# Altium PCB uSwitchCoder.PcbDoc
Units mm, origin at the board's own origin, x right, y up, seen from the top; angles counter-clockwise.
Board outline 45 x 35 mm, 2 copper layers (Top Layer, Bottom Layer); 21 components, 16 nets, 91 pads, 41 vias.
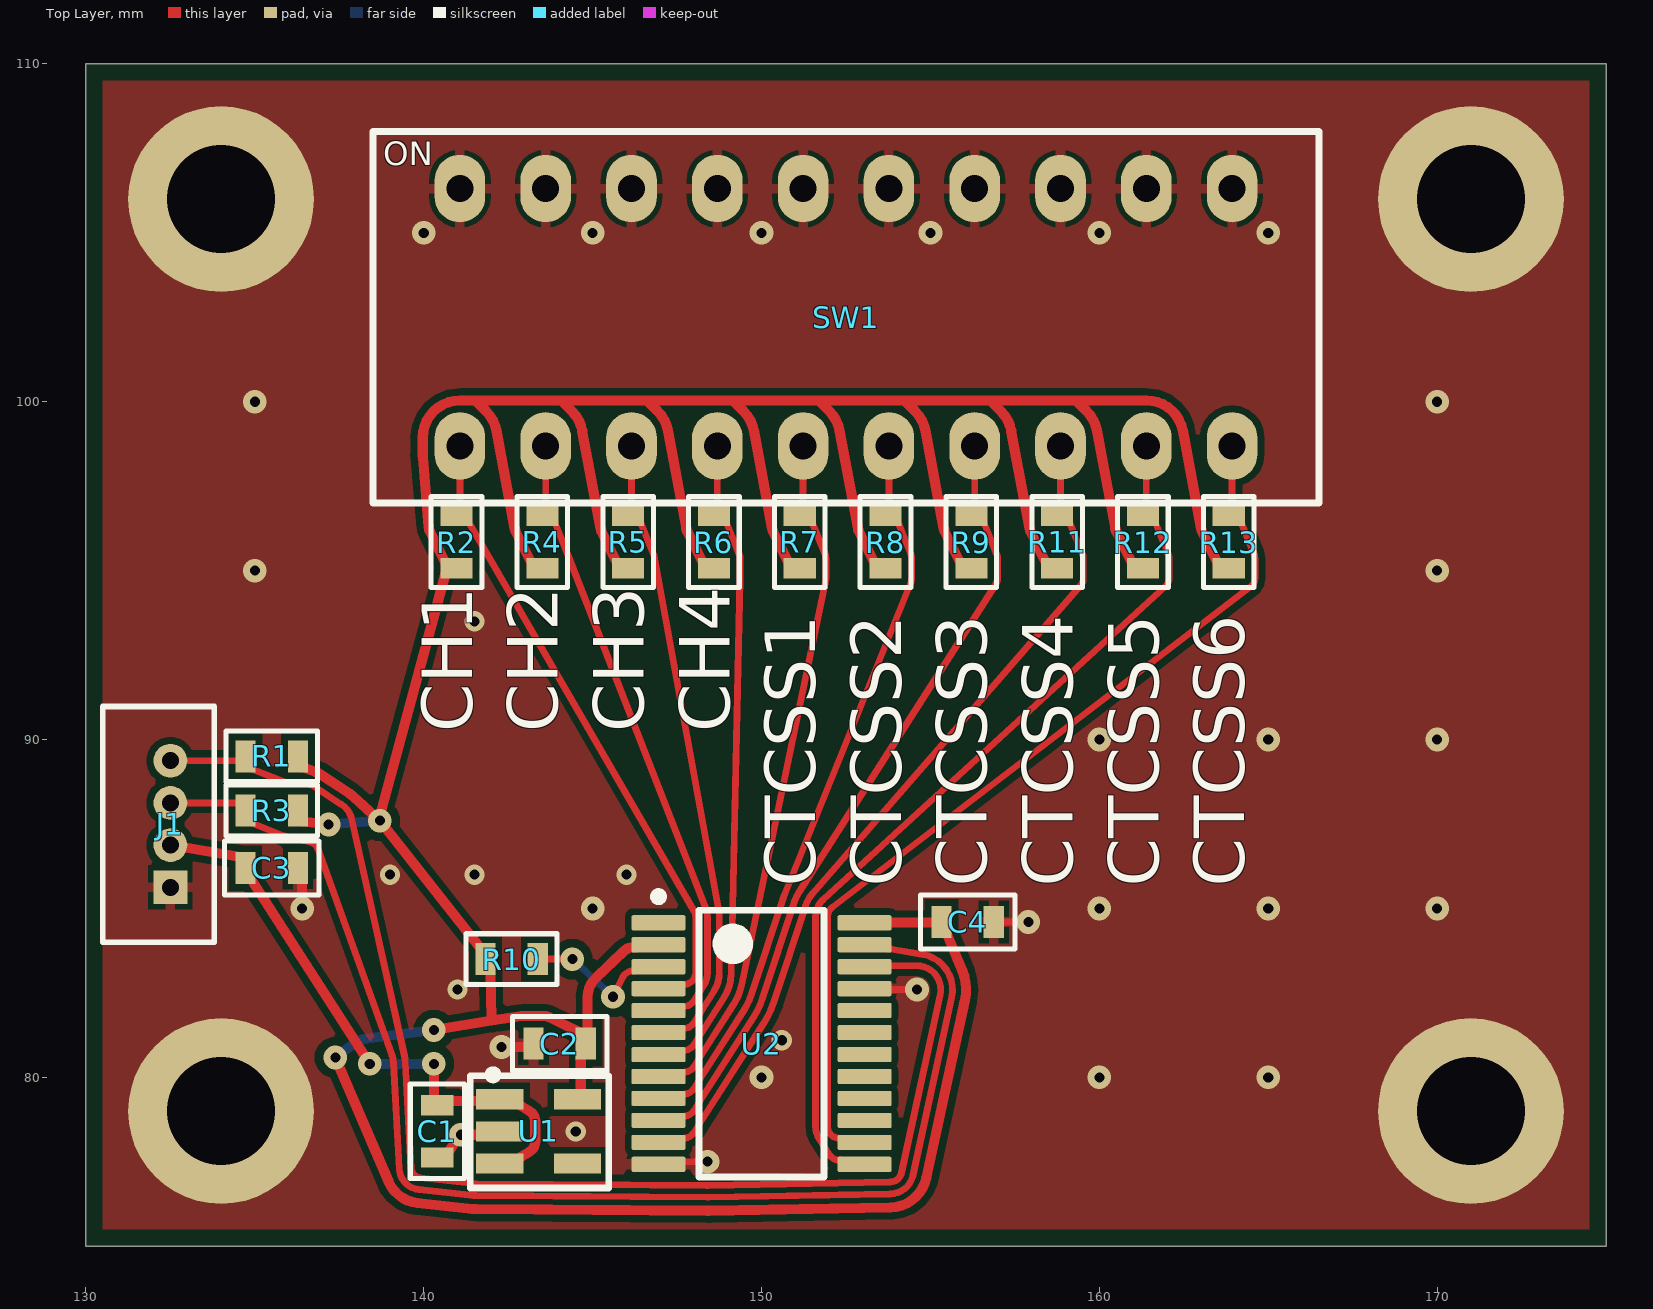
[diagram p0: Top Layer view]
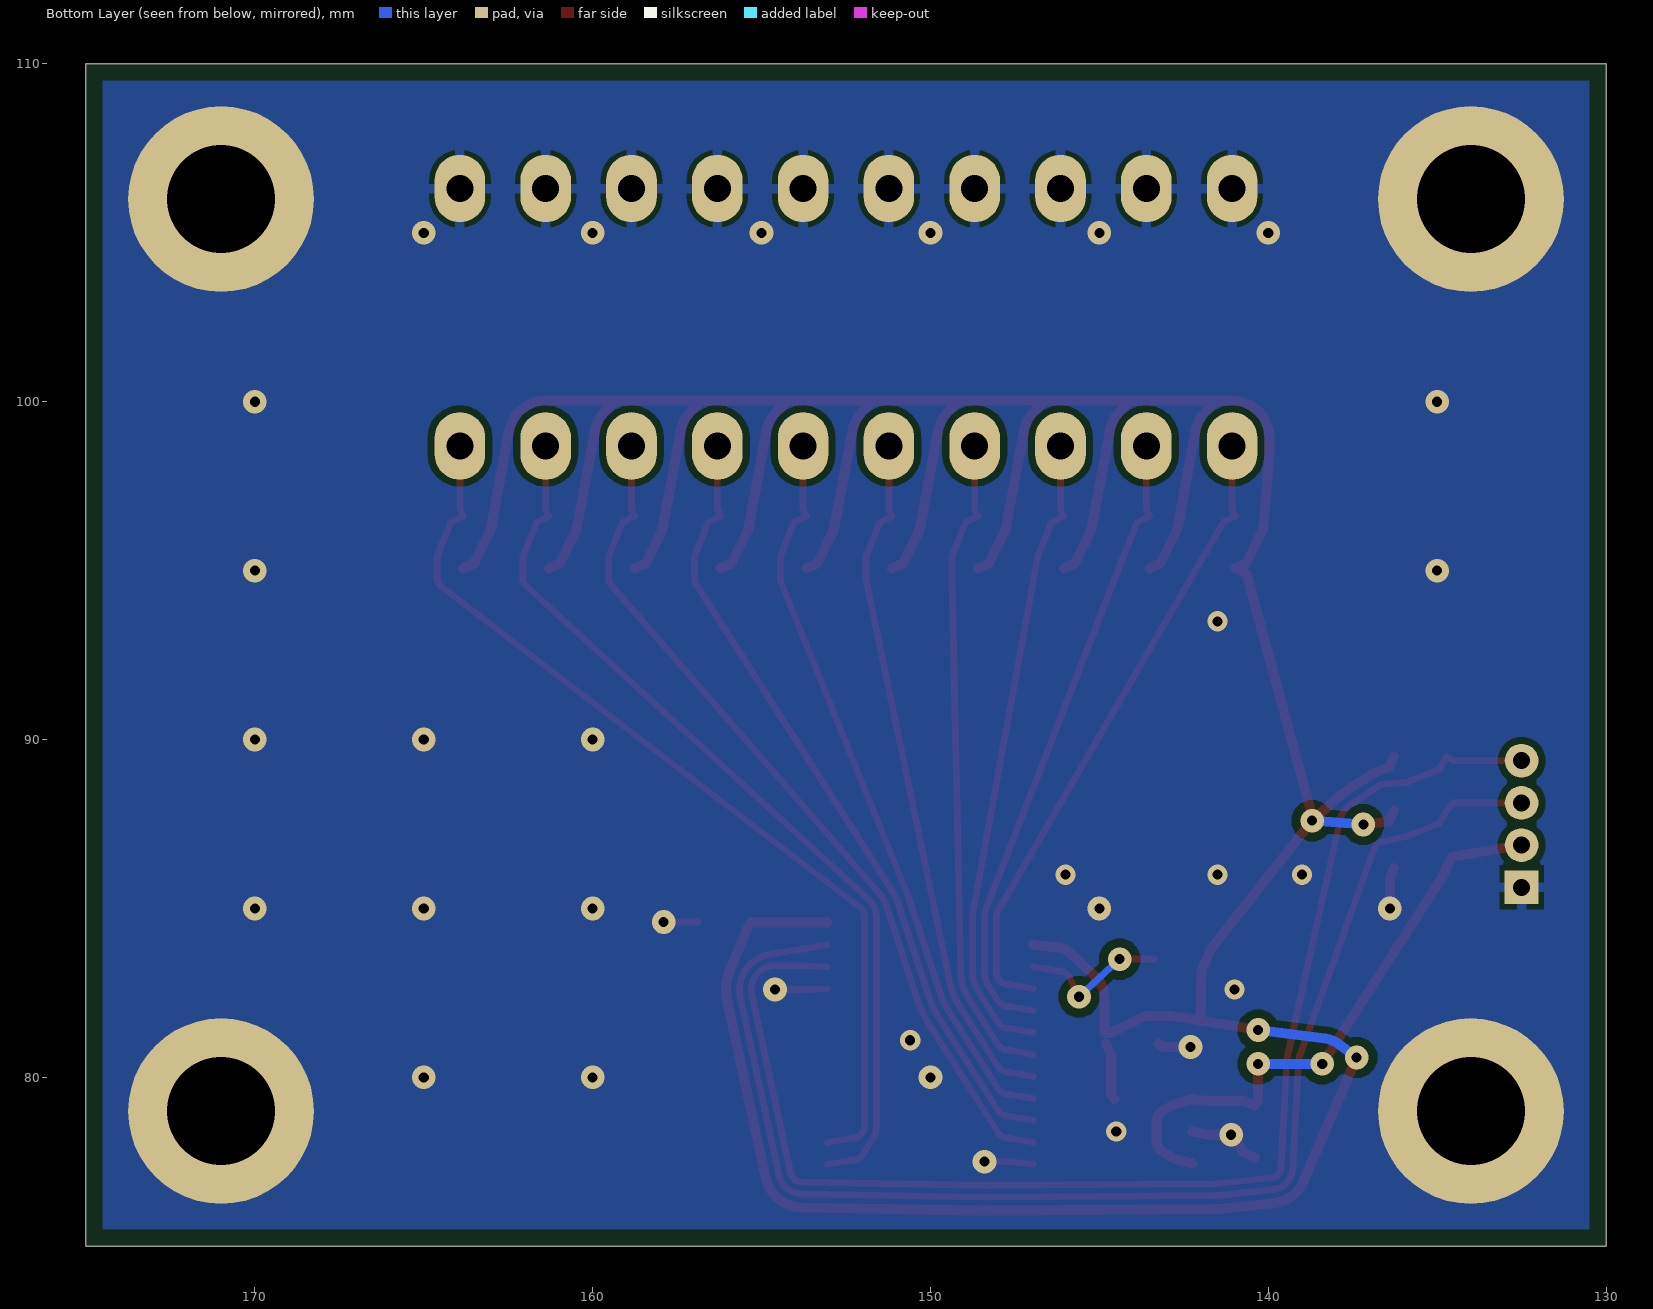
[diagram p1: Bottom Layer view, seen from below]
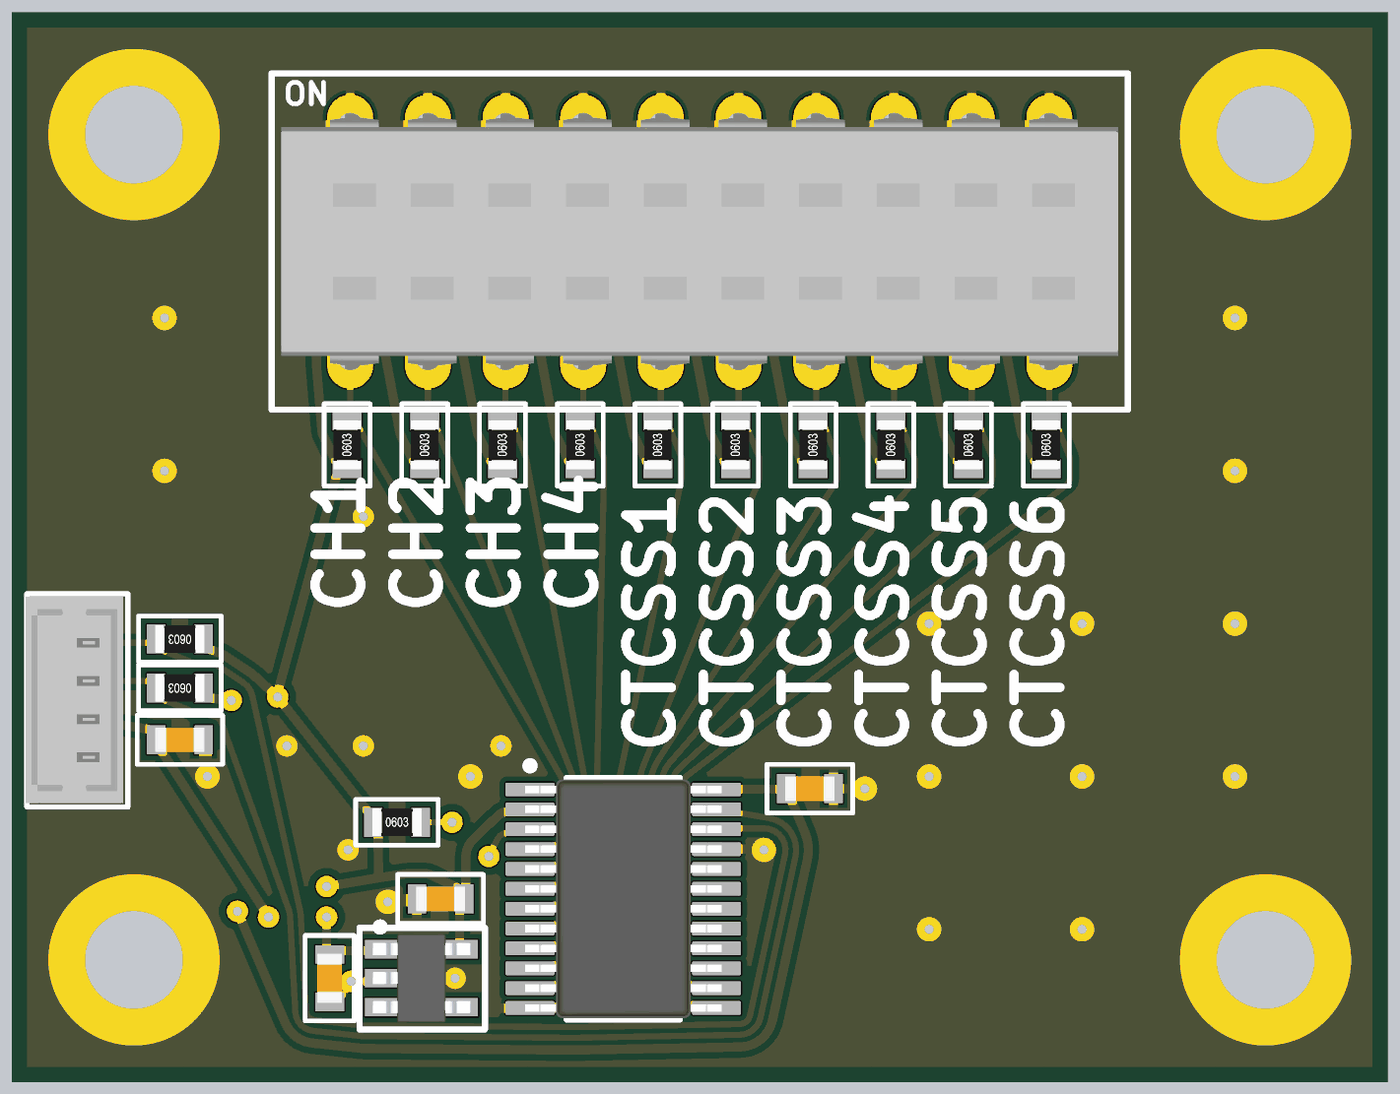
[diagram p2: 3D render of the assembled board from above, using the file's embedded part models]

## Layer stack, top to bottom
Top Solder: solder mask 0.0102, Solder Resist, Dk 3.5
Top Layer: signal copper 0.0356
Dielectric 1: dielectric 0.32, FR-4, Dk 4.8
Bottom Layer: signal copper 0.0356
Bottom Solder: solder mask 0.0102, Solder Resist, Dk 3.5

## Board outline
130,75 175,75 175,110 130,110

## Design rules (kind name [scope] priority, off if disabled: settings)
Clearance [All] p1: gap=0.2 ignorepadtopadclearanceinfootprint=FALSE except(0: Arc-Hole Track-Hole SMDPad-Hole THPad-Hole Via-Hole Fill-Hole Poly-Hole Region-Hole Text-Hole; 0.15: Arc-Arc Arc-Track Track-Track SMDPad-SMDPad; 0.152: Arc-Text Track-Text SMDPad-Text THPad-Text Via-Text Fill-Text Poly-Text Region-Text Text-Text; 0.254: Arc-Via Track-Via Via-Via Via-Fill Via-Poly Via-Region; 0.5: THPad-Via)
ComponentClearance [All] p1: gap=0.15 collisioncheckmode=3 verticalgap=0.254 showdistances=FALSE
HoleSize [All] p1: absolutevalues=TRUE maxlimit=6.3 minlimit=0.2 maxpercent=80.000 minpercent=20.000
HoleToHoleClearance [All] p1: gap=0.5 allowstackedmicrovias=TRUE
MinimumAnnularRing [All] p1: minimumring=0.13
MinimumSolderMaskSliver [All] p1: minsoldermaskwidth=0.2
PlaneConnect [All] p1: planeconnectstyle=Direct reliefexpansion=0.508 reliefentries=4 reliefconductorwidth=0.254 reliefairgap=0.254
PolygonConnect "Free pads to gnd" [(ObjectKind = 'Pad') And (Component = 'Free') vs InNet('GND')] p1: connectstyle=Direct reliefconductorwidth=0.254 reliefentries=4 polygonreliefangle="90 Angle" airgapwidth=0.254
PolygonConnect "Footprint connection" [All vs HasFootprint('DCC6C') or HasFootprint('32K243-40ML5 ro4003c') or HasFootprint('CONUFL001-SMD-T')] p2: connectstyle=Direct reliefconductorwidth=0.254 reliefentries=4 polygonreliefangle="90 Angle" airgapwidth=0.254
PolygonConnect "Via connection" [All vs IsVia or IsShieldingVia or IsStitchingVia] p3: connectstyle=Direct reliefconductorwidth=0.254 reliefentries=4 polygonreliefangle="90 Angle" airgapwidth=0.254
PolygonConnect [All] p4: connectstyle=Relief reliefconductorwidth=0.3 reliefentries=4 polygonreliefangle="90 Angle" airgapwidth=0.15
RoutingCorners [All] p1: cornerstyle=45-Degree minsetback=1 maxsetback=2.54
RoutingVias [All] p1: holewidth=0.3 width=0.6 viastyle="Through Hole" minholewidth=0.3 minwidth=0.6 maxholewidth=6 maxwidth=7
SilkToSilkClearance [All] p1: silktosilkclearance=0
SilkToSolderMaskClearance [IsPad] p1: minsilkscreentomaskgap=0.15 clearancetoexposedcopper=TRUE
SolderMaskExpansion SolderMaskExpansion_1 [IsVia] p1: expansion=-0.1 istentingtop=FALSE
SolderMaskExpansion [All] p2: expansion=0.05 istentingtop=FALSE
UnRoutedNet [All] p1: checkbadconnections=TRUE
Width [All] p1: maxlimit=3 minlimit=0.15 preferedwidth=0.2
21 further rules are at their usual default settings.

## Components (designator, comment, footprint, x,y, rotation, side; value= is the part's Value field where it differs from the comment)
C1 "10u, 10V, X6S" SMD0603 140.4,78.4 r90 top
C2 "10u, 10V, X6S" SMD0603 144.024,80.996 r0 top
C3 "1u, 25V, X7R" SMD0603 135.5,86.2 r0 top
C4 "1u, 25V, X7R" SMD0603 156.1,84.6 r0 top
J1 "53047-0410" 530470410 132.5,87.5 r90 top
R1 "100k, 1%" "SMD0603 - R" 135.5,89.5 r180 top
R2 "100k, 1%" "SMD0603 - R" 140.97,95.845 r90 top
R3 "100k, 1%" "SMD0603 - R" 135.5,87.9 r180 top
R4 "100k, 1%" "SMD0603 - R" 143.51,95.845 r90 top
R5 "100k, 1%" "SMD0603 - R" 146.05,95.845 r90 top
R6 "100k, 1%" "SMD0603 - R" 148.59,95.845 r90 top
R7 "100k, 1%" "SMD0603 - R" 151.13,95.845 r90 top
R8 "100k, 1%" "SMD0603 - R" 153.67,95.845 r90 top
R9 "100k, 1%" "SMD0603 - R" 156.21,95.845 r90 top
R10 "100k, 1%" "SMD0603 - R" 142.6,83.5 r0 top
R11 "100k, 1%" "SMD0603 - R" 158.75,95.845 r90 top
R12 "100k, 1%" "SMD0603 - R" 161.29,95.845 r90 top
R13 "100k, 1%" "SMD0603 - R" 163.83,95.845 r90 top
SW1 "ADE1004" ADE1004 152.5,102.5 r90 top
U1 "LDK320M33R" SOT23-5 143.4,78.4 r0 top
U2 "TCA9539PWR" PW0024A_M 150,81 r0 top

## Footprints (in the part's own frame and the unit in brackets; to place one, negate y for a bottom-side part, rotate by r counter-clockwise, add the part's x,y. Pads: shape width x height; smd on the part's side, far side on the other; paste and mask are expansions set on the pad)
530470410 [mm]
  rect 1x1 hole 0.5: 1(-1.875,0)
  round 1 hole 0.5: 2(-0.625,0) 3(0.625,0) 4(1.875,0)
  silkscreen extent -3.5,-1.3 3.47,2, body extent -3.37,-1.15 3.38,2.05, height 4.23
ADE1004 [mm]
  oval 2x1.5 hole 0.8: 1(-3.81,11.43) 2(3.81,11.43) 3(-3.81,8.89) 4(3.81,8.89) 5(-3.81,6.35) 6(3.81,6.35) 7(-3.81,3.81) 8(3.81,3.81) 9(-3.81,1.27) 10(3.81,1.27) 11(-3.81,-1.27) 12(3.81,-1.27) 13(-3.81,-3.81) 14(3.81,-3.81) 15(-3.81,-6.35) 16(3.81,-6.35) 17(-3.81,-8.89) 18(3.81,-8.89) 19(-3.81,-11.43) 20(3.81,-11.43)
  silkscreen extent -5.5,-14 5.5,14, body extent -4.19,-13.69 4.19,13.69, height 5.79
PW0024A_M [mm] "SOP, 24-Leads, Body 7.9x4.5mm, Pitch 0.65mm, IPC Low Density"
  rrect22% 1.6x0.45 smd: 1(-3.05,3.575) 2(-3.05,2.925) 3(-3.05,2.275) 4(-3.05,1.625) 5(-3.05,0.975) 6(-3.05,0.325) 7(-3.05,-0.325) 8(-3.05,-0.975) 9(-3.05,-1.625) 10(-3.05,-2.275) 11(-3.05,-2.925) 12(-3.05,-3.575) 13(3.05,-3.575) 14(3.05,-2.925) 15(3.05,-2.275) 16(3.05,-1.625) 17(3.05,-0.975) 18(3.05,-0.325) 19(3.05,0.325) 20(3.05,0.975) 21(3.05,1.625) 22(3.05,2.275) 23(3.05,2.925) 24(3.05,3.575)
  silkscreen extent -3.17,-3.95 1.85,4.47, body extent -3.21,-3.9 3.21,3.9, height 1
SMD0603 [mm] "2-Leads, Body 1,60x0,85mm(0603), IPC Medium Density"
  rect 0.6x0.95 smd: 1(-0.775,0) 2(0.775,0)
  silkscreen extent -1.4,-0.8 1.4,0.8, body extent -0.8,-0.4 0.8,0.4, height 0.7
"SMD0603 - R" [mm] "2-Leads, Body 1,60x0,85mm(0603), IPC Medium Density"
  rect 0.6x0.95 smd: 1(-0.775,0) 2(0.775,0)
  silkscreen extent -1.35,-0.75 1.35,0.75, body extent -0.8,-0.45 0.8,0.45, height 0.5
SOT23-5 [mm] "SOT23, 5-Leads, Body 2,90x2,80mm, Pitch 0,95mm, IPC Medium Density"
  rect 1.4x0.6 smd: 1(-1.15,0.95) 2(-1.15,0) 3(-1.15,-0.95) 4(1.15,-0.95) 5(1.15,0.95)
  silkscreen extent -2.02,-1.68 2.08,1.8, body extent -1.6,-1.45 1.6,1.45, height 0.94

## Part data
C1 C2: library part GRT188C81A106ME13D, "Cap Ceramic 10uF 10V X6S 20% Pad SMD 0603 105C Automotive T/R", Capacitance=10uF, Case Code (Imperial)=0603, Case Code (Metric)=1608, Manufacturer=Murata, Max Operating Temperature=105°C, Min Operating Temperature=-55°C, Ratings=AEC-Q200, Supplier Part Number 1=81-GRT188C81A106ME3D, Tolerance=20%, Voltage Rating=10V, Case/Package=0603, Category="Ceramic Capacitors", ComponentLink1Description=http://search.murata.co.jp/Ceramy/image/img/A01X/G101/ENG/GRT188C81A106ME13-01.pdf?src-supplier=Digi-Key, ComponentLink1URL=http://search.murata.co.jp/Ceramy/image/img/A01X/G101/ENG/GRT188C81A106ME13-01.pdf?src-supplier=Digi-Key, Length=0.063inch, Manufacturer Part Number=GRT188C81A106ME13D, Mount="Surface Mount", Packaging="Tape and Reel", Pricing 1="1=0.41000, 10=0.20100, 50=0.20100, 100=0.17200, 1000=0.10900, 10000=0.09700 (USD)", RoHS=No, Stock 1=1862, Supplier 1=Mouser, Supplier 2=Farnell, Supplier 3=Digi-Key, Supplier Part Number 2=3582904, Supplier Part Number 3=490-12283-6-ND, Thickness=0.035inch, Width=0.031inch
C3 C4: library part CGA3E1X7R1E105K080AC, "CAP CER 1UF 25V X7R 0603", Capacitance=1u, Manufacturer="TDK Corporation", Operating Temperature="-55°C ~ 125°C", Package / Case="0603 (1608 Metric)", Ratings=AEC-Q200, Supplier Part Number 1=810-CGA3E1X7R1E105K, Temperature Coefficient=X7R, Tolerance=±10%, Voltage - Rated=25V, Applications=Automotive, Category=Capacitors, ComponentLink1Description=https://product.tdk.com/info/en/catalog/datasheets/mlcc_automotive_general_en.pdf, ComponentLink1URL=https://product.tdk.com/info/en/catalog/datasheets/mlcc_automotive_general_en.pdf, Failure Rate=-, Features=-, Height - Seated (Max)=-, Lead Spacing=-, Lead Style=-, Manufacturer Part Number=CGA3E1X7R1E105K080AC, Mounting Type="Surface Mount, MLCC", Packaging="Cut Tape (CT)", Part Status=Active, Pricing 1="1=0.2, 10=0.135, 100=0.0686, 500=0.04696, 1000=0.04154 (USD)", RoHS="RoHS Compliant", Size / Dimension="0.063\" L x 0.032\" W (1.60mm x 0.80mm)", Stock 1=109509, Supplier 1=Mouser, Supplier 2=Farnell, Supplier 3=Digi-Key, Supplier Part Number 2=2346962, Supplier Part Number 3=445-6931-1-ND, Thickness (Max)="0.035\" (0.90mm)"
J1: "1.25mm Pitch, PicoBlade PCB Header, Single Row, Vertical, Through Hole, Tin Plating, Friction Lock, 4 Circuits, Tray, 2.30mm PC Tail Length", Color=Natural, Contact Resistance=20mR, Housing Color=White, Manufacturer=Molex, Manufacturer Part Number=0530470410, Max Operating Temperature=85°C, Max Voltage Rating (AC)=125V, Min Operating Temperature=-40°C, Supplier Part Number 1=538-53047-0410, Category="Headers and Wire Housings", ComponentLink1Description=https://datasheet.ciiva.com/3934/87920530470410-pcb-headers-3934064.pdf?src-supplier=Arrow, ComponentLink1URL=https://datasheet.ciiva.com/3934/87920530470410-pcb-headers-3934064.pdf?src-supplier=Arrow, Connector Type="Blade Pin", Contact Material=Bronze, Contact Mating Length=0.089inch, Contact Plating=Tin, Depth=3.2mm, Housing Material=Nylon, Length=6.75mm, Mount="Through Hole", Number of Contacts=4, Number of Positions=4, Number of Rows=1, Orientation=Straight, Packaging=Tray, Pitch=1.25mm, Pricing 4="1=0,27000, 10=0,23400, 100=0,18000, 500=0,15400, 1000=0,13000, 5000=0,11200, 10000=0,10400 (USD)", RoHS=Yes, Stock 4=7971, Supplier 1=Mouser, Supplier 2=Farnell, Supplier 3=Digi-Key, Supplier 4=Avnet, Supplier Part Number 2=9733060, Supplier Part Number 3=WM1733-ND, Supplier Part Number 4=0530470410, Termination=Solder
R1 R2 R3 R4 R5 R6 R7 R8 R9 R10 R11 R12 R13: library part RC0603FR-07100KL, "RES SMD 100K OHM 1% 1/10W 0603", Manufacturer=Yageo, Operating Temperature="-55°C ~ 155°C", Package / Case="0603 (1608 Metric)", Power (Watts)="0.1W, 1/10W", Resistance=100k, Supplier Device Package=0603, Supplier Part Number 1=603-RC0603FR-07100KL, Temperature Coefficient=±100ppm/°C, Tolerance=±1%, Category=Resistors, ComponentLink1Description=http://www.yageo.com/documents/recent/PYu-RC_Group_51_RoHS_L_8.pdf, ComponentLink1URL=http://www.yageo.com/documents/recent/PYu-RC_Group_51_RoHS_L_8.pdf, Composition="Thick Film", Failure Rate=-, Features="Moisture Resistant", Height - Seated (Max)="0.022\" (0.55mm)", Manufacturer Part Number=RC0603FR-07100KL, Packaging="Cut Tape (CT)", Part Status=Active, Pricing 1="1=0.1, 10=0.015, 100=0.006, 1000=0.00268, 2500=0.00233 (USD)", RoHS="RoHS Compliant", Size / Dimension="0.063\" L x 0.032\" W (1.60mm x 0.80mm)", Stock 1=14618646, Supplier 1=Mouser, Supplier 2=Farnell, Supplier 3=Digi-Key, Supplier Part Number 2=9238727, Supplier Part Number 3=311-100KHRCT-ND
SW1: "Switch DIP OFF ON SPST 10 Extended Slide 0.1A 24VDC PC Pins 2.54mm Thru-Hole Tube", Case/Package=DIP, Contact Resistance=50mR, Manufacturer="TE Connectivity", Max Operating Temperature=85°C, Max Voltage Rating (DC)=24V, Min Operating Temperature=-30°C, Package Quantity=15, Power Rating=400mW, Supplier Part Number 1=506-ADE1004, Actuator Length=1mm, Actuator Material=Polyamide, ComponentLink1Description=https://datasheet.ciiva.com/5257/ng-cd-1825057-o2-147422-5257872.pdf?src-supplier=Mouser, ComponentLink1URL=https://datasheet.ciiva.com/5257/ng-cd-1825057-o2-147422-5257872.pdf?src-supplier=Mouser, ComponentLink2Description=https://datasheet.ciiva.com/24391/7365eng-cd-1825057-o2-24391238.pdf?src-supplier=Onlinecomponents.com, ComponentLink2URL=https://datasheet.ciiva.com/24391/7365eng-cd-1825057-o2-24391238.pdf?src-supplier=Onlinecomponents.com, Contact Material="Copper Alloy", Contact Plating=Gold, Electrical Life=1000Cycles, Lead Free="Lead Free", Manufacturer Part Number=ADE1004, Mount="Through Hole", Number of Positions=10, Orientation=Straight, Packaging=Rail/Tube, Pricing 1="1 = 1.62000, 10 = 1.53000, 25 = 1.37000, 50 = 1.37000, 100 = 1.34000, 250 = 1.18000, 500 = 1.12000, 1000 = 0.99600, 2500 = 0.93400, 5000 = 0.89000, 10000 = 0.89000 (USD)", Pricing 2="1 = 1.62000, 15 = 1.52600, 30 = 1.46400, 60 = 1.37050, 105 = 1.33933, 255 = 1.18357, 510 = 1.12129, 1005 = 0.99671, 5010 = 0.87212 (USD)", Pricing 3="3000 = 0.97080, 5010 = 0.90170, 1 = 1.75560, 15 = 1.50050, 30 = 1.42240, 60 = 1.32940, 105 = 1.27930, 255 = 1.12030, 510 = 1.05470, 1005 = 0.92500, 5010 = 0.83650 (USD)", RoHS=Yes, Stock 1=19, Stock 2=3794, Stock 3=5100, Stock 4=514, Supplier 1=Mouser, Supplier 2=Digi-Key, Supplier 3=Arrow, Supplier 4=Farnell, Supplier Part Number 2=1825057-9-ND, Supplier Part Number 3=1825057-9, Supplier Part Number 4=2468732, Switching Capacity=400mW, Terminal Pitch=2.54mm, Termination=Solder, Throw Configuration=SPST
U1: "IC REG LINEAR 200MA SOT23-5", Current - Output=200mA, Manufacturer=STMicroelectronics, Operating Temperature="-40°C ~ 125°C (TJ)", Package / Case="SC-74A, SOT-753", Supplier Device Package=SOT-23-5, Supplier Part Number 1=511-LDK320M33R, Voltage - Input (Max)=18V, Voltage - Output (Min/Fixed)=3.3V, Voltage Dropout (Max)="0.35V @ 200mA", Category="Integrated Circuits (ICs)", ComponentLink1Description=http://www.st.com/content/ccc/resource/technical/document/datasheet/0e/0c/26/c9/a4/d4/4b/a1/DM00236470.pdf/files/DM00236470.pdf/jcr:content/translations/en.DM00236470.pdf, ComponentLink1URL=http://www.st.com/content/ccc/resource/technical/document/datasheet/0e/0c/26/c9/a4/d4/4b/a1/DM00236470.pdf/files/DM00236470.pdf/jcr:content/translations/en.DM00236470.pdf, Control Features=Enable, Manufacturer Part Number=LDK320M33R, Mounting Type="Surface Mount", Output Configuration=Positive, Output Type=Fixed, Packaging="Cut Tape (CT)", Part Status=Active, Pricing 1="1=0.85, 10=0.748, 100=0.5733, 500=0.4532, 1000=0.36256 (USD)", Protection Features="Over Current, Over Temperature", PSRR="88dB (120Hz)", RoHS="RoHS Compliant", Stock 1=5592, Supplier 1=Mouser, Supplier 2=Farnell, Supplier 3=Digi-Key, Supplier Part Number 2=3130011, Supplier Part Number 3=497-17034-1-ND
U2: library part CMP-0314-00251-2, "Remote 16-Bit I2C and SMBus, Low-Power I/O Expander with Interrupt Output, Reset & Config. Register, 1.65 to 5.5 V, -40 to 85 degC, 24-pin TSSOP (PW), Green (RoHS & no Sb/Br)", 5V Tolerant I/O=Yes, Manufacturer="Texas Instruments", Max Frequency(kHz)=400, # of I/Os=16, Code_JEDEC=MO-153, ComponentLink1Description=Datasheet, ComponentLink1URL=http://www.ti.com/general/docs/lit/getliterature.tsp?genericPartNumber=TCA9539&fileType=pdf, ComponentLink2Description="Package Specification", ComponentLink2URL=http://www.ti.com/litv/pdf/mpds177g, Configuration Registers=Yes, DatasheetVersion=SCPS202A, Eco-Plan="Green (RoHS & no Sb/Br)", I2C Address="1110 1xx", Interrupt Output=Yes, Low Power=Yes, Mounting Technology="Surface Mount", PackageDescription="24-Pin Thin Small Outline Package 0.65 mm Pitch", PackageReference=PW0024A, PackageVersion="revG, Feb-2011", PartNumber=TCA9539PWR, Push-Pull I/O Type=Yes, Reset Input=Yes, SubFamily="I2C IO Expander", Vcc range(V)="1.65 to 5.5"

## Free pads (board coordinates)
  round 5.5 hole 3.2: 0(134,79) 0(134,106) 0(171,79) 0(171,106)

## Via types
v1: diameter 0.7, hole 0.3, Top Layer to Bottom Layer, 34 vias
v2: diameter 0.6, hole 0.3, Top Layer to Bottom Layer, 7 vias

## Nets (pads, with @x,y where several pads share a name; then routed paths per layer and width w, separated by ;. In a path a pad name is that pad's centre, name@x,y a point inside that pad or via, vN(x,y) a via of type N, cw(c..) or ccw(c..) an arc to the next point about the centre after c; other vN are vias at no path point)
+3V3: C2.2 C4.1 R1.1 R2.1 R3.1 R4.1 R5.1 R6.1 R7.1 R8.1 R9.1 R10.1 R11.1 R12.1 R13.1 U1.5 U2.2 U2.24 | length 141.6
  Top Layer w0.3: R3.1 136.425,87.575 v1(137.182,87.487) ; R1.1 136.425,89.175 136.815,89.033 cw(c136.575,88.375) 136.962,88.958 137.793,88.407 cw(c137.182,87.487) 137.924,88.305 138.681,87.618 cw(c138.479,87.396) 138.683,87.616 v1(138.7,87.6) ; v1(137.382,80.588) 138.96,76.911 ccw(c139.925,77.325) 139.814,76.281 141.438,76.106 ccw(c141.55,77.15) 141.542,76.1 148.391,76.05 ccw(c148.4,77.504) 148.427,76.05 153.819,76.15 ccw(c153.801,77.249) 154.875,77.016 156.021,82.291 ccw(c154.6,82.6) 155.941,83.162 155.475,84.275 C4.1 155.175,84.582 153.7,84.582 U2.24 ; v1(140.3,81.4) 142.002,81.686 ; R4.1 143.185,95.22 142.72,96.167 cw(c143.035,96.32) 142.691,96.255 142.151,99.142 ccw(c141.07,98.94) 141.849,99.716 141.526,100.04 ; U1.5 144.649,79.5 144.649,80.671 C2.2 ; R5.1 145.725,95.22 145.26,96.167 cw(c145.575,96.32) 145.231,96.255 144.691,99.142 ccw(c143.61,98.94) 144.389,99.716 144.066,100.04 ; U2.2 146.3,83.85 146.199,83.85 ccw(c146.199,83.451) 145.923,83.739 145.081,82.929 ccw(c145.603,82.386) 144.849,82.386 144.849,81.321 144.649,81.321 143.704,81.785 ccw(c143.549,81.471) 143.549,81.821 142.949,81.821 ccw(c142.949,81.471) 142.898,81.817 142.008,81.687 ccw(c142.051,81.39) 142.003,81.686 ; R6.1 148.265,95.22 147.8,96.167 cw(c148.115,96.32) 147.771,96.255 147.231,99.142 ccw(c146.15,98.94) 146.929,99.716 146.606,100.04 ; R7.1 150.805,95.22 150.34,96.167 cw(c150.655,96.32) 150.311,96.255 149.771,99.142 ccw(c148.69,98.94) 149.469,99.716 149.146,100.04 ; R8.1 153.345,95.22 152.88,96.167 cw(c153.195,96.32) 152.851,96.255 152.311,99.142 ccw(c151.23,98.94) 152.009,99.716 151.686,100.04 ; R9.1 155.885,95.22 155.42,96.167 cw(c155.735,96.32) 155.391,96.255 154.851,99.142 ccw(c153.77,98.94) 154.549,99.716 154.226,100.04 ; R11.1 158.425,95.22 157.96,96.167 cw(c158.275,96.32) 157.931,96.255 157.391,99.142 ccw(c156.31,98.94) 157.089,99.716 156.766,100.04 ; R12.1 160.965,95.22 160.5,96.167 cw(c160.815,96.32) 160.471,96.255 159.931,99.142 ccw(c158.85,98.94) 159.629,99.716 159.306,100.04 ; R13.1 163.505,95.22 163.04,96.167 cw(c163.355,96.32) 163.011,96.255 162.471,99.142 ccw(c161.39,98.94) 161.39,100.04 159.306,100.04 ; v1(138.7,87.6) 138.7,87.704 cw(c139,87.704) 138.71,87.782 140.645,94.92 R2.1 140.645,95.22 140.18,96.167 cw(c140.495,96.32) 140.146,96.29 139.974,98.349 cw(c141.07,98.44) 139.97,98.44 139.97,98.94 cw(c141.07,98.94) 141.07,100.04 141.526,100.04 ; v1(138.7,87.6) 141.675,83.825 R10.1 141.975,83.175 142.002,81.686 ; 141.526,100.04 144.066,100.04 ; 144.066,100.04 146.606,100.04 ; 146.606,100.04 149.146,100.04 ; 149.146,100.04 151.686,100.04 ; 151.686,100.04 154.226,100.04 ; 154.226,100.04 156.766,100.04 ; 156.766,100.04 159.306,100.04
  Bottom Layer w0.3: v1(137.182,87.487) v1(138.7,87.6) ; v1(137.382,80.588) 137.954,81.008 cw(c138.4,80.4) 138.306,81.148 v1(140.3,81.4)
+5V: C1.2 C3.1 J1.2 U1.1 U1.3 | length 17.6
  Top Layer w0.3: J1.2 134.575,86.525 C3.1 134.875,85.875 v1(138.4,80.4) ; v1(140.3,80.4) 140.3,79.325 C1.2 140.725,79.298 141.7,79.298 U1.1 142.8,79.2 143.131,78.999 cw(c142.95,78.7) 143.3,78.7 143.3,78.1 cw(c142.95,78.1) 143.131,77.801 142.8,77.6 U1.3
  Bottom Layer w0.3: v1(138.4,80.4) v1(140.3,80.4)
"CHANNEL 1": R2.2 SW1.1 U2.4 | length 18.9
  Top Layer w0.2: SW1.1 141.07,96.82 R2.2 141.345,96.42 148.003,84.926 cw(c147.701,84.751) 148.05,84.751 148.05,83.099 cw(c147.701,83.099) 147.701,82.75 147.65,82.75 U2.4
"CHANNEL 2": R4.2 SW1.3 U2.5 | length 18.7
  Top Layer w0.2: SW1.3 143.61,96.82 R4.2 143.885,96.42 144.263,95.482 cw(c143.985,95.37) 144.264,95.479 148.352,85.005 cw(c147.701,84.751) 148.4,84.751 148.4,83.099 cw(c147.701,83.099) 148.29,82.723 147.995,82.261 cw(c147.701,82.449) 147.701,82.1 147.65,82.1 U2.5
"CHANNEL 3": R5.2 SW1.5 U2.6 | length 18.9
  Top Layer w0.2: SW1.5 146.15,96.82 R5.2 146.425,96.42 146.803,95.482 cw(c146.525,95.37) 146.82,95.424 148.733,84.939 cw(c147.701,84.751) 148.75,84.751 148.75,83.099 cw(c147.701,83.099) 148.584,82.533 148.291,82.074 ; U2.6 147.65,81.45 147.701,81.45 ccw(c147.701,81.799) 147.995,81.611 148.29,82.073
"CHANNEL 4": R6.2 SW1.7 U2.7 | length 19.5
  Top Layer w0.2: U2.7 147.65,80.8 147.701,80.8 ccw(c147.701,81.149) 147.995,80.961 148.88,82.346 ccw(c147.701,83.099) 149.1,83.07 149.365,94.763 ccw(c149.065,94.77) 149.365,94.77 149.365,95.37 ccw(c149.065,95.37) 149.343,95.482 148.965,96.42 R6.2 148.69,96.82 SW1.7
"CTCSS 1": R7.2 SW1.9 U2.8 | length 20.5
  Top Layer w0.2: U2.8 147.65,80.15 147.701,80.15 ccw(c147.701,80.499) 147.995,80.311 148.29,80.773 149.174,82.156 ccw(c147.701,83.099) 149.413,82.744 151.899,94.709 ccw(c151.605,94.77) 151.905,94.77 151.905,95.37 ccw(c151.605,95.37) 151.883,95.482 151.505,96.42 R7.2 151.23,96.82 SW1.9
"CTCSS 2": R8.2 SW1.11 U2.9 | length 21.8
  Top Layer w0.2: U2.9 147.65,79.5 147.701,79.5 ccw(c147.701,79.849) 147.995,79.661 149.468,81.966 ccw(c147.701,83.099) 149.695,82.444 150.639,85.3 cw(c152.299,84.751) 150.678,85.407 154.423,94.657 ccw(c154.145,94.77) 154.445,94.77 154.445,95.37 ccw(c154.145,95.37) 154.423,95.482 154.045,96.42 R8.2 153.77,96.82 SW1.11
"CTCSS 3": R9.2 SW1.13 U2.10 | length 23.6
  Top Layer w0.2: U2.10 147.65,78.85 147.701,78.85 ccw(c147.701,79.199) 147.995,79.011 148.29,79.473 ; 148.291,79.474 149.765,81.781 ccw(c147.701,83.099) 150.027,82.332 150.971,85.19 cw(c152.299,84.751) 151.12,85.504 156.938,94.608 ccw(c156.685,94.77) 156.985,94.77 156.985,95.37 ccw(c156.685,95.37) 156.963,95.482 156.585,96.42 R9.2 156.31,96.82 SW1.13
"CTCSS 4": R11.2 SW1.15 U2.11 | length 25.6
  Top Layer w0.2: U2.11 147.65,78.2 147.701,78.2 ccw(c147.701,78.549) 147.995,78.361 150.059,81.591 ccw(c147.701,83.099) 150.359,82.221 151.303,85.08 cw(c152.299,84.751) 151.508,85.439 159.451,94.573 ccw(c159.225,94.77) 159.525,94.77 159.525,95.37 ccw(c159.225,95.37) 159.503,95.482 159.125,96.42 R11.2 158.85,96.82 SW1.15
"CTCSS 5": R12.2 SW1.17 U2.13 | length 27.1
  Top Layer w0.2: U2.13 152.35,77.55 152.299,77.55 cw(c152.299,77.899) 152.005,77.711 151.71,78.174 cw(c152.299,78.549) 151.6,78.549 151.6,84.751 cw(c152.299,84.751) 151.827,85.266 161.968,94.549 ccw(c161.765,94.77) 162.065,94.77 162.065,95.37 ccw(c161.765,95.37) 162.043,95.482 161.665,96.42 R12.2 161.39,96.82 SW1.17
"CTCSS 6": R13.2 SW1.19 U2.14 | length 28
  Top Layer w0.2: U2.14 152.35,78.2 152.299,78.2 cw(c152.299,78.549) 151.95,78.549 151.95,84.751 cw(c152.299,84.751) 152.087,85.028 164.487,94.532 ccw(c164.305,94.77) 164.605,94.77 164.605,95.37 ccw(c164.305,95.37) 164.583,95.482 164.205,96.42 R13.2 163.93,96.82 SW1.19
GND: C1.1 C2.1 C3.2 C4.2 J1.1 pad.0 SW1.2 SW1.4 SW1.6 SW1.8 SW1.10 SW1.12 SW1.14 SW1.16 SW1.18 SW1.20 U1.2 U2.12 U2.21 | length 8.4
  Top Layer w0.2: U2.12 147.65,77.504 v1(148.4,77.504) ; U2.21 153.75,82.6 v1(154.6,82.6) ; C4.2 v1(157.9,84.6)
  Top Layer w0.3: C3.2 136.4,85.875 v1(136.4,85) ; C1.1 140.725,77.775 140.972,78.162 cw(c141.224,78) 141.012,78.212 v1(141.1,78.3) 141.7,78.3 U1.2 ; v1(142.3,80.9) 143.099,80.9 C2.1
  other v1: 150,80 160,80 165,80 145,85 160,85 165,85 170,85 160,90 165,90 170,90 135,95 170,95 135,100 170,100 140,105 145,105 150,105 155,105 160,105 165,105
  other v2: 144.5,78.4 150.6,81.1 141,82.6 139,86 141.5,86 146,86 141.5,93.5
NetR10_2: R10.2 U2.3 | length 4.5
  Top Layer w0.2: R10.2 v1(144.4,83.5) ; v1(145.603,82.386) 145.886,82.956 cw(c146.199,82.8) 146.199,83.15 146.25,83.15 U2.3
  Bottom Layer w0.2: v1(144.4,83.5) v1(145.603,82.386)
SCL: J1.4 R1.2 U2.22 | length 39.7
  Top Layer w0.2: J1.4 134.525,89.375 R1.2 134.925,89.125 135.863,88.747 ccw(c135.975,89.025) 135.95,88.726 136.599,88.674 cw(c136.575,88.375) 136.741,88.625 137.571,88.074 cw(c137.182,87.487) 137.869,87.64 139.429,80.629 cw(c138.4,80.4) 139.452,80.457 139.625,77.309 ccw(c139.925,77.325) 139.893,77.027 141.518,76.852 ccw(c141.55,77.15) 141.549,76.85 148.396,76.8 ccw(c148.4,77.504) 148.415,76.8 153.808,76.9 ccw(c153.801,77.249) 154.142,77.175 155.288,82.451 ccw(c154.6,82.6) 154.6,83.304 153.75,83.304 U2.22
SDA: J1.3 R3.2 U2.23 | length 39.4
  Top Layer w0.2: J1.3 134.525,88.125 R3.2 134.925,87.525 135.863,87.147 ccw(c135.975,87.425) 135.909,87.132 136.641,86.968 cw(c136.575,86.675) 136.857,86.776 139.063,80.638 ; 139.063,80.638 cw(c138.4,80.4) 139.103,80.437 139.276,77.289 ccw(c139.925,77.325) 139.858,76.678 141.479,76.504 ccw(c141.55,77.15) 141.545,76.5 148.393,76.45 ccw(c148.4,77.504) 148.421,76.45 153.813,76.55 ccw(c153.801,77.249) 154.484,77.101 155.63,82.376 ccw(c154.6,82.6) 154.777,83.639 153.859,83.795 ccw(c153.801,83.451) 153.801,83.8 153.75,83.8 U2.23
pads on no net: U1.4 U2.1 U2.15 U2.16 U2.17 U2.18 U2.19 U2.20

## Polygon pours and split planes (outlines as drawn)
GND on Bottom Layer "GND_L02_P001" (solid, remove dead copper, pour order 1): 130.5,75.5 174.5,75.5 174.5,109.5 130.5,109.5
GND on Top Layer "GND_L01_P000" (solid, remove dead copper, pour order 0): 130.5,75.5 174.5,75.5 174.5,109.5 130.5,109.5

## Silkscreen, mask and mechanical layers (free items; w line width, h text height)
Top Overlay:
  text "CH1" at 141.432,90.216 h1.5 r90
  text "CH2" at 143.972,90.216 h1.5 r90
  text "CH3" at 146.512,90.216 h1.5 r90
  text "CH4" at 149.052,90.216 h1.5 r90
  text "CTCSS1" at 151.592,85.644 h1.5 r90
  text "CTCSS2" at 154.132,85.644 h1.5 r90
  text "CTCSS3" at 156.672,85.644 h1.5 r90
  text "CTCSS4" at 159.212,85.644 h1.5 r90
  text "CTCSS5" at 161.752,85.644 h1.5 r90
  text "CTCSS6" at 164.292,85.644 h1.5 r90
Mechanical 1:
  the board outline again, w0.1
Top Designator (Mech29):
  lines w0.2: 138.533,104.62 138.533,104.648 149.86,104.648 ; 149.86,97.028 149.86,104.648 ; 166.497,104.604 166.497,104.648 149.86,104.648
  text "+1" at 138.884,102.816 h1.3
  text "1" at 141.532,101.8 h1.3 r90
  text "2" at 144.072,101.8 h1.3 r90
  text "4" at 146.612,101.8 h1.3 r90
  text "8" at 149.152,101.8 h1.3 r90
  text "1" at 151.692,101.8 h1.3 r90
  text "2" at 154.232,101.8 h1.3 r90
  text "4" at 156.772,101.8 h1.3 r90
  text "8" at 159.312,101.8 h1.3 r90
  text "16" at 161.852,101.8 h1.3 r90
  text "32" at 164.392,101.8 h1.3 r90
  text "Channel" at 140.408,98.244 h1.3
  text "CTCSS" at 153.108,98.244 h1.3
  text "SCL" at 126.184,90.116 h1.3
  text "SDA" at 126.184,88.084 h1.3
  text "+5V" at 126.184,86.052 h1.3
  text "GND" at 126.184,84.02 h1.3

## Text inside footprints (layer, text, board x,y; h text height)
SW1: Top Designator (Mech29) "ON" at 138.8,107 h0.7; Top Overlay "ON" at 138.8,107 h0.7